# Altium PCB BSPD.PcbDoc (part 2 of 2)
Units mm, origin at the board's own origin, x right, y up, seen from the top; angles counter-clockwise.
Board outline 45 x 32.6 mm, 2 copper layers (Top Layer, Bottom Layer); 26 components, 20 nets, 79 pads, 28 vias.
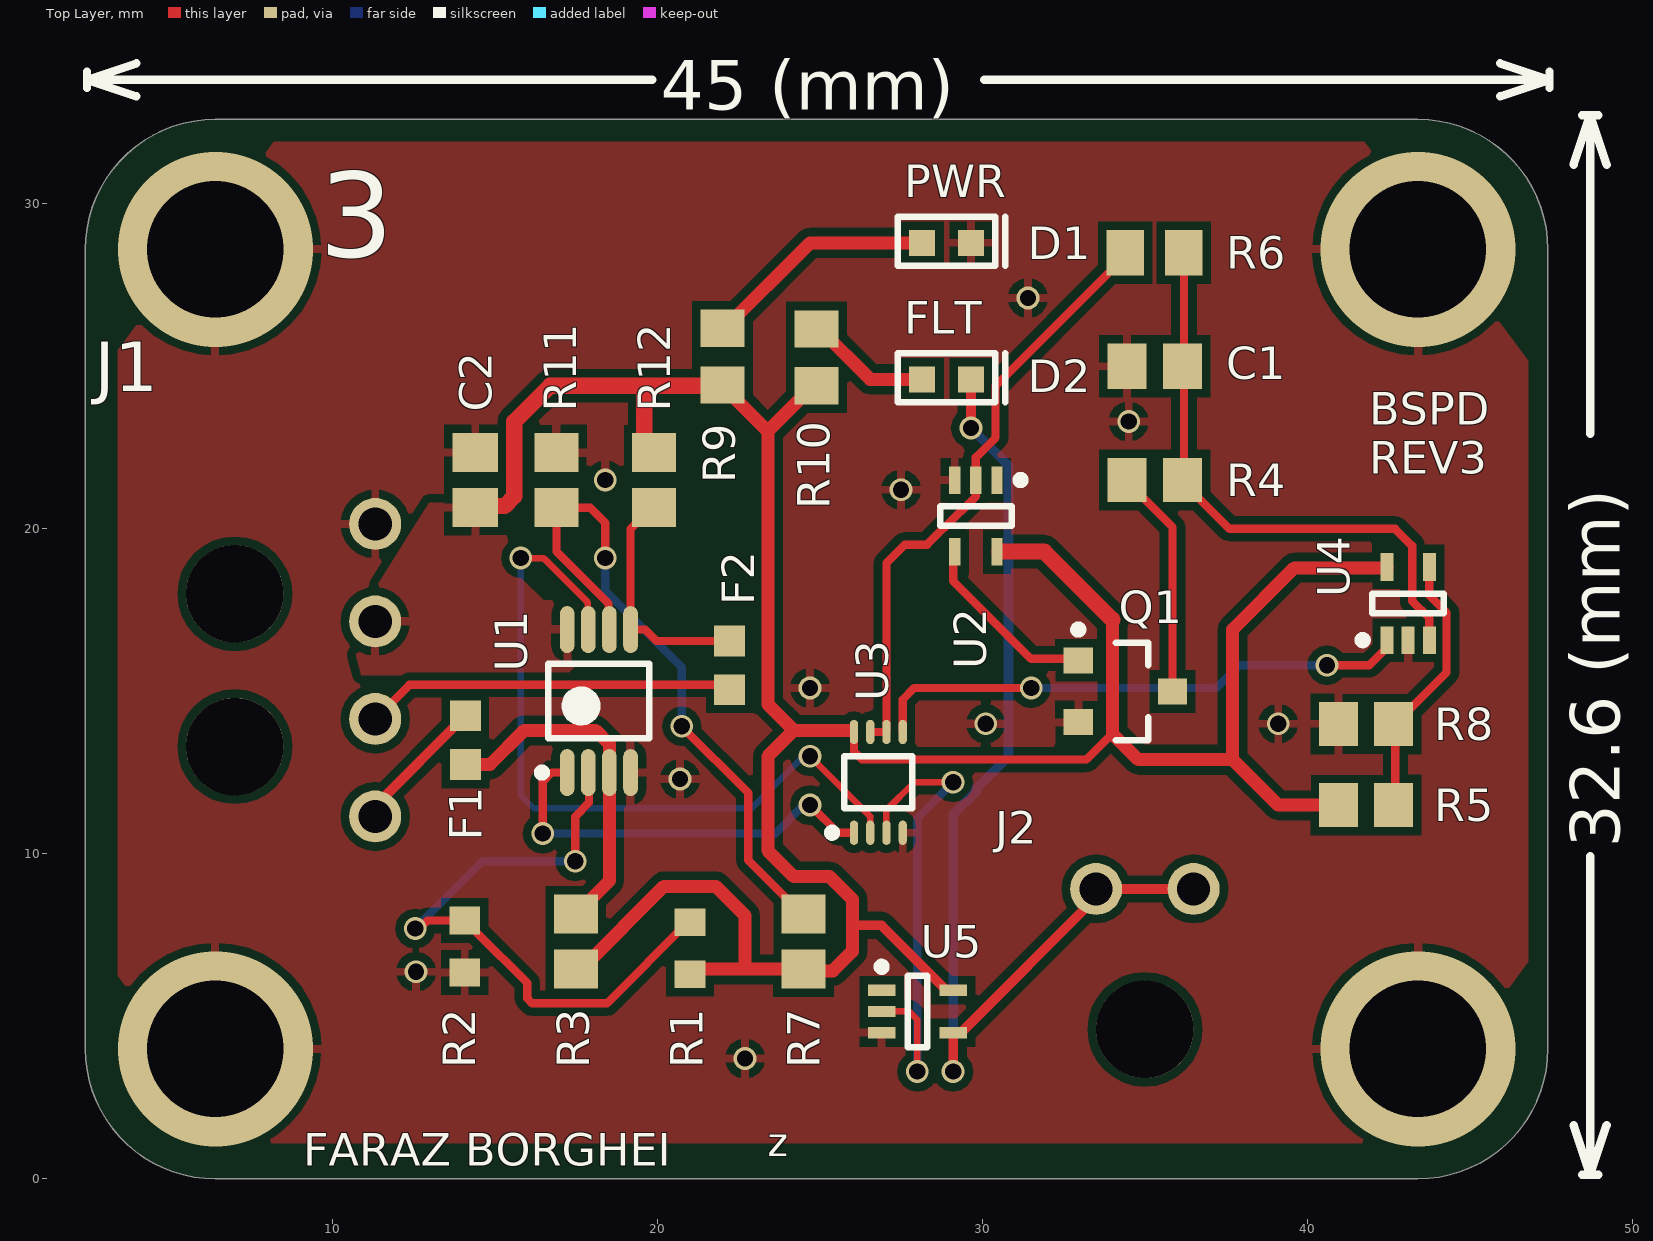
[diagram p0: Top Layer view]

## Via types
v1: diameter 0.7, hole 0.5, Top Layer to Bottom Layer, 24 vias
v2: diameter 6, hole 4.2, Top Layer to Bottom Layer, 4 vias

## Nets (pads, with @x,y where several pads share a name; then routed paths per layer and width w, separated by ;. In a path a pad name is that pad's centre, name@x,y a point inside that pad or via, vN(x,y) a via of type N, cw(c..) or ccw(c..) an arc to the next point about the centre after c; other vN are vias at no path point) (continued)
SIG_OUT: (continued)
  Bottom Layer w0.254: v1(28,3.3) 28,11.1 v1(29.1,12.2)
V_LOGIC: R6.1 U2.2 U3.6 U3.7 | length 18.7
  Top Layer w0.254: U3.7@26.57,13.75 U3.6@27.03,13.75 ; U3.6 27.05,18.95 27.612,19.512 28.3,19.512 28.84,20.052 28.852,20.052 29.8,21 U2.2 29.8,22.2 30.4,22.8 30.4,24.4 34.4,28.4 R6.1
V_LOGIC_DELAYED: U3.5 U4.1 | length 16.8
  Top Layer w0.254: U3.5 27.55,14.75 27.9,15.1 v1(31.5,15.1) ; v1(40.6,15.8) 41.9,15.8 42.45,16.35 U4.1
  Bottom Layer w0.254: v1(31.5,15.1) 37.2,15.1 37.9,15.8 v1(40.6,15.8)
VREF_BRAKE_SENS: R7.1 R11.2 U1.6 | length 20.9
  Top Layer w0.254: v1(18.4,19.1) 18.4,20.175 17.925,20.65 R11.2 16.9,19.3 18.5,17.7 U1.6@18.5,16.7 ; v1(20.75,13.925) 22.8,11.875 22.8,9.8 R7.1@24.45,8.15
  Bottom Layer w0.254: v1(18.4,19.1) 18.4,18.15 18.375,18.125 20.75,15.75 v1(20.75,13.925)
VREF_CRT_SENS: R1.1 R2.2 U1.2 | length 19.6
  Top Layer w0.254: v1(12.55,7.7) 12.671,7.7 12.921,7.95 R2.2 14.125,7.95 14.423,7.652 14.423,7.602 16,6.025 16,5.549 16.149,5.4 18.45,5.4 R1.1@20.95,7.9 ; v1(17.475,9.775) 17.475,11.15 17.9,11.575 U1.2@17.9,12.5
  Bottom Layer w0.254: v1(12.55,7.7) 14.625,9.775 v1(17.475,9.775)
VREF_RC: R5.1 R8.2 U4.4 | length 8.2
  Top Layer w0.254: R5.1@42.7,11.5 42.7,14 44.277,15.577 44.277,17.423 43.75,17.95 U4.4
pads on no net: J1.5 J1.6 J2.3 U2.1 U5.1

## Polygon pours and split planes (outlines as drawn)
5V on Top Layer "5V Plane" (solid, pour order 38): 10.517,16.89 12.979,20.8 15.4,20.8 15.4,18.9 16.5,17.8 17.6,17.8 17.6,15.9 17.2,15.5 10.882,15.5
no net on Top Layer "Top Layer-No Net 2" (solid, pour order 16): 18.6,44.7
no net on Top Layer "Top Layer-No Net 1" (solid, pour order 18): 31.3,44.2
no net on Top Layer "Top Layer-No Net 3" (solid, pour order 10): 40,21
no net on Top Layer "Top Layer-No Net" (solid, pour order 6): 10.6,32.3
GND on Top Layer "GND Plane" (solid, remove dead copper, pour order 36): 3.4,25.5 8.194,31.904 41.755,31.904 46.8,25.164 46.8,6.678 42.619,1.093 7.259,1.093 3.4,6.247
GND on Bottom Layer "Bottom Layer-GND" (solid, remove dead copper, pour order 34): 3.408,25.286 8.294,31.859 41.822,31.859 46.708,25.286 46.708,6.473 42.833,1.259 7.62,1.259 3.408,6.926

## Other copper
Bottom Layer:
  pour cut-out: 23.149,11.14 24.573,12.565 25.135,12.565 25.135,11.935 24.213,11.013 23.276,11.013

## Silkscreen, mask and mechanical layers (free items; w line width, h text height)
Top Overlay:
  lines w0.254: 2.45,33.56 2.45,34.068 ; 3.974,33.306 2.45,33.814 ; 3.974,34.322 2.45,33.814 ; 19.846,33.814 2.45,33.814 ; 30.054,33.814 47.45,33.814 ; 45.926,33.306 47.45,33.814 ; 45.926,34.322 47.45,33.814 ; 47.45,33.56 47.45,34.068 ; 48.192,1.651 48.7,0.127 ; 48.192,31.203 48.7,32.727 ; 48.446,0.127 48.954,0.127 ; 48.446,32.727 48.954,32.727 ; 48.7,9.927 48.7,0.127 ; 48.7,22.927 48.7,32.727 ; 49.208,1.651 48.7,0.127 ; 49.208,31.203 48.7,32.727
  text "45 (mm)" at 20.1,32.9 h1.52
  text "PWR" at 27.6,30.2 h1
  text "3" at 9.6,27.5 h4.5
  text "FLT" at 27.6,26 h1
  text "BSPD / REV3" at 41.9,21.7 h1
  text "32.6 (mm)" at 49.614,10.181 h1.52 r90
  text "FARAZ BORGHEI" at 9.1,0.4 h1
  text "z" at 23.4,0.4 h1.5
Bottom Overlay:
  text "GND" at 15.7,19.7 h1
  text "5V" at 14.9,16.8 h1
  text "BRAKE_SENS" at 22.7,13.7 h1
  text "CRT_SENS" at 20.8,10.7 h1
  text "BSPD_OUT" at 33,10.5 h1 r270
  text "BSPD_OUT" at 36,10.5 h1 r270
Board Outline:
  lines w0.1: 2.4,28.6 ccw(c2.4,28.6) 2.4,28.6 ; 2.4,28.6 cw(c6.4,28.6) 6.4,32.6 43.4,32.6 cw(c43.4,28.6) 47.4,28.6 47.4,4 ; 2.4,28.6 2.4,4 ccw(c6.4,4) 6.4,0 43.4,0 ccw(c43.4,4) 47.4,4 ; 47.4,4 ccw(c47.4,4) 47.4,4